# Altium PCB Copy of SoM.PcbDoc (part 5 of 8)
Units mm, origin at the board's own origin, x right, y up, seen from the top; angles counter-clockwise.
Board outline 69.6 x 50 mm, 10 copper layers ([1] Signal HS-H, [2] GND, [3] Signal HS-V, [4] Signal H, [5] GND, [6] POWER, [7] Signal V, [8] Signal HS-H, [9] GND, [10] Signal HS-V), stack 1.146 mm thick; 537 components, 516 nets, 5689 pads, 981 vias.
Unrouted connection lines stored in the file: 963.
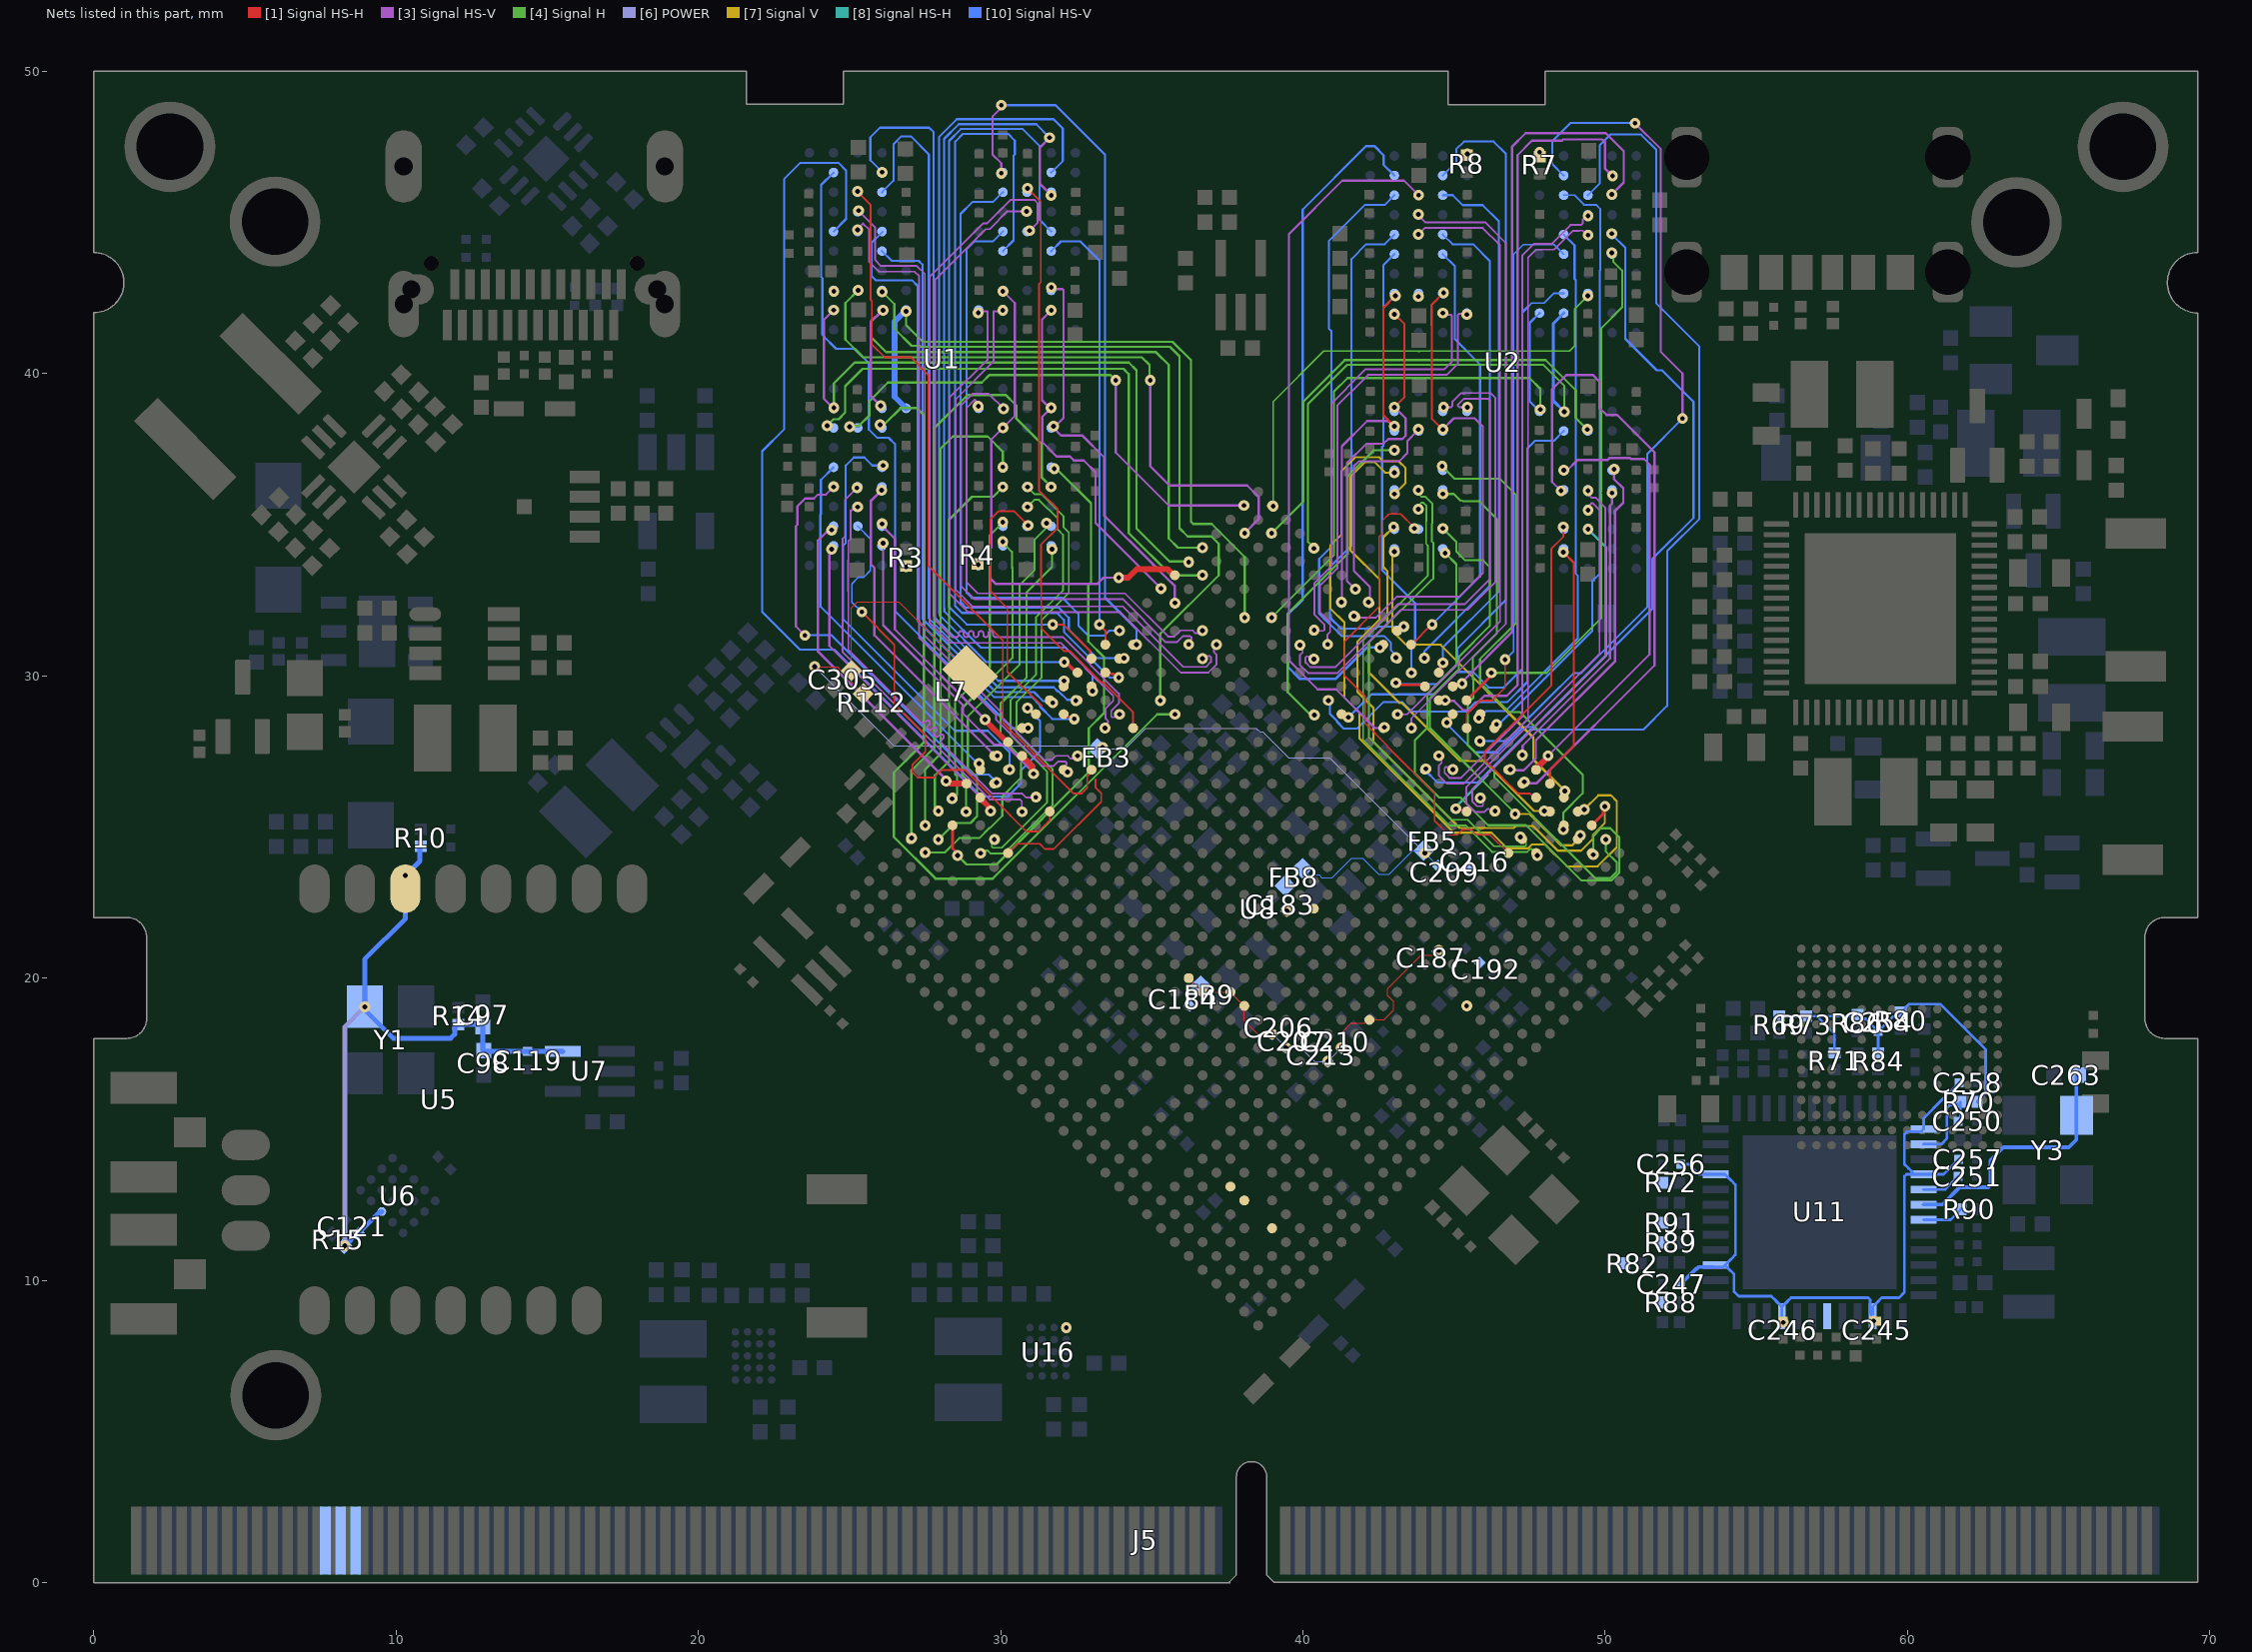
[diagram p10: the nets of this part, all layers, seen from the top]

## Via types
v1: diameter 0.36, hole 0.16, [1] Signal HS-H to [10] Signal HS-V, 895 vias
v2: diameter 0.35, hole 0.16, [1] Signal HS-H to [10] Signal HS-V, 22 vias
v3: diameter 0.4, hole 0.2, [1] Signal HS-H to [10] Signal HS-V, 13 vias
v4: diameter 0.35, hole 0.15, [1] Signal HS-H to [10] Signal HS-V, 12 vias
v5: diameter 0.35, hole 0.15, [1] Signal HS-H to [8] Signal HS-H, 11 vias
v6: diameter 0.35, hole 0.2, [1] Signal HS-H to [8] Signal HS-H, 6 vias
v7: diameter 0.5, hole 0.25, [1] Signal HS-H to [10] Signal HS-V, 6 vias
v8: diameter 0.35, hole 0.15, [3] Signal HS-V to [10] Signal HS-V, 6 vias
v9: diameter 0.35, hole 0.2, [3] Signal HS-V to [10] Signal HS-V, 4 vias
v10: diameter 0.36, hole 0.16, [1] Signal HS-H to [3] Signal HS-V, 4 vias
v11: diameter 0.5, hole 0.25, [1] Signal HS-H to [8] Signal HS-H, 2 vias

## Nets (pads, with @x,y where several pads share a name; then routed paths per layer and width w, separated by ;. In a path a pad name is that pad's centre, name@x,y a point inside that pad or via, vN(x,y) a via of type N, cw(c..) or ccw(c..) an arc to the next point about the centre after c; other vN are vias at no path point)
+1V8: C97.2 C98.2 C119.2 C121.2 R10.2 R14.2 R15.1 U5.13 U6.C4 U7.5 Y1.4 | length 24.1
  [6] POWER w0.16: v1(8.312,11.145) 8.312,18.394 v1(8.968,19.05)
  [10] Signal HS-V w0.16: R15.1@8.286,11.145 v1(8.312,11.145) 8.732,11.566 C121.2@8.758,11.566 9.444,12.252 9.509,12.252 U6.C4@9.533,12.277 ; R10.2@10.82,24.358 10.793,24.33 10.793,23.874 v1(10.312,23.393) 10.312,21.971 8.968,20.627 v1(8.968,19.05) 8.968,18.95 9.918,18 10.05,18 10.058,18.009 11.811,18.009 11.945,18.143 11.945,18.355 12.055,18.465 R14.2@12.065,18.465 12.802,18.465 C97.2@12.878,18.39 12.878,17.628 C98.2@12.903,17.602 12.933,17.572 C119.2@14.351,17.572 14.353,17.574 15.517,17.574 U7.5@15.519,17.577
A5_U1: R3.1 U1.A5
  other v1: 26.873,33.604
A5_U2: R7.2 U2.A5
  other v1: 47.828,47.321
A8_U1: R4.1 U1.A8
  other v1: 29.261,33.68
A8_U2: R8.2 U2.A8
  other v1: 45.441,47.27
ADC_IN0: J5.26 U8.AG26
ADC_IN2: J5.28 U8.AG25
ADC_IN3: J5.30 U8.AG28
AVDD3V3_RGMII: C250.2 C251.2 R70.2 U11.6 U11.38 U11.41 | length 4.4
  [10] Signal HS-V w0.09: U11.41@60.529,13.007 61.247,13.007 C251.2@61.676,13.437 ; U11.38@60.529,14.507 61.116,14.507 61.303,14.694 61.303,15.71 61.392,15.799 61.645,15.799 R70.2@61.747,15.9 61.747,15.336 C250.2@61.676,15.265
AVDD_0V9: C183.2 FB8.2 U8.R17
  other v1: 39.465,22.22
AVDD_1V8: C184.2 FB9.2 U8.P18
CKXTAL1: C263.2 U11.42 Y3.1 | length 8.6
  [10] Signal HS-V w0.12: U11.42@60.529,12.507 61.148,12.507 61.722,13.081 62.668,13.081 62.738,13.151 62.738,13.97 63.17,14.402 65.329,14.402 65.586,14.659 Y3.1@65.586,15.462 65.586,16.728 C263.2@65.648,16.79
CKXTAL2: R90.2 U11.43 | length 1.4
  [10] Signal HS-V w0.09: U11.43@60.529,12.007 61.424,12.007 61.765,12.348 R90.2@61.765,12.358
CPU_B_SLEEP: U8.M27 U16.A1
  other v1: 32.172,8.439 45.415,19.075
DDR0_A0: U1.H2 U1.R2 U8.F2 | length 19.6
  [4] Signal H w0.077: v1(24.257,38.278) 24.469,38.489 24.64,38.489 24.858,38.708 24.858,39.579 25.437,40.157 34.061,40.157 34.239,39.98 34.239,34.722 35.634,33.327 v1(36.682,33.327)
  other v1: 24.486,42.723
DDR0_A1: U1.J2 U1.P2 U8.F1 | length 22.2
  [3] Signal HS-V w0.077: v1(24.475,42.1) 24.155,41.78 24.155,39.167 24.46,38.862 v1(24.486,38.862)
  [4] Signal H w0.077: v1(24.486,38.862) 24.486,39.675 25.171,40.361 34.239,40.361 34.493,40.107 34.493,34.874 35.585,33.782 36.195,33.782 v1(36.22,33.757)
DDR0_A2: U1.H9 U1.R9 U8.G1 | length 16.5
  [1] Signal HS-H w0.192: v1(33.909,33.249) 34.224,33.249 34.504,33.528 35.524,33.528 35.725,33.327 U8.G1@35.762,33.327
  [3] Signal HS-V w0.077: v1(30.075,42.725) 30.472,42.328 30.472,38.597 v1(30.075,38.2) 29.693,37.818 29.693,34.239 29.652,34.198 29.652,33.228 29.834,33.045 33.199,33.045 33.402,33.249 v1(33.909,33.249)
DDR0_A4: U1.H11 U1.R11 U8.H2 | length 13
  [3] Signal HS-V w0.077: v2(31.674,42.85) 31.726,42.798 32.035,42.798 32.08,42.752 32.08,38.532 31.75,38.202 32.006,37.946 32.705,37.946 33.426,37.224 33.426,35.299 35.036,33.69 35.46,33.266 35.763,32.963 v1(35.763,32.41)
  other v1: 31.75,38.252
DDR0_A5: U1.J11 U1.P11 U8.H1 | length 11.6
  [3] Signal HS-V w0.077: v1@31.623,38.862 31.369,39.116 31.369,41.783 v1(31.674,42.088) ; v1(31.674,38.862) 31.648,38.837 31.377,38.566 31.377,37.736 31.861,37.252 ; 31.862,37.253 32.293,37.253 32.424,37.122 32.748,37.122 33.139,36.731 33.139,35.06 v1(35.306,32.893)
DDR0_CKE0: U1.J4 U1.P4 U8.E1 | length 21.6
  [3] Signal HS-V w0.077: v1(26.035,38.938) 25.705,39.268 25.705,41.707 v1@26.06,42.062
  [4] Signal H w0.077: v1@26.06,42.062 25.705,41.707 25.705,41.224 26.223,40.706 35.139,40.706 35.56,40.284 35.56,34.544 35.865,34.239 v1(36.678,34.239)
  other v1: 26.111,42.088
DDR0_CKE1: U1.J5 U1.P5 U8.F5 | length 23.5
  [4] Signal H w0.077: v1(26.873,42.062) 26.873,41.605 27.426,41.052 35.689,41.052 36.297,40.445 36.297,35.103 36.373,35.027 36.982,35.027 38.075,33.934 v1(38.075,31.928)
  [10] Signal HS-V w0.191: U1.J5@26.875,38.85 26.492,39.233 26.492,41.717 U1.P5@26.875,42.1
DDR0_CLK1_N: U1.P9 U8.J5 | length 20.1
  [3] Signal HS-V w0.062: v1(30.074,42.088) 30.05,42.064 29.762,42.064 29.762,40.391 28.51,39.139 28.51,32.856 29.072,32.295 34.038,32.295 36.037,30.296 36.795,30.296 36.955,30.456 36.955,30.622 36.919,30.658 36.851,30.658 36.762,30.569 v1(36.682,30.569)
DDR0_CLK1_P: U1.P8 U8.H5 | length 20.9
  [3] Signal HS-V w0.062: v1(29.261,42.012) 29.313,42.064 29.573,42.064 29.573,40.469 28.321,39.218 28.321,32.715 28.931,32.106 33.96,32.106 35.959,30.106 36.873,30.106 37.144,30.378 37.144,30.7 37.052,30.792 37.052,30.859 37.141,30.948 v1(37.141,31.029)
DDR0_CLK_N: U1.J9 U8.J4 | length 16.5
  [3] Signal HS-V w0.062: v1(30.099,38.837) 29.611,39.325 29.069,39.325 28.691,38.946 28.691,32.981 29.134,32.537 34.036,32.537 35.463,31.11 35.828,31.11 36.03,31.312 36.27,31.312 36.307,31.276 36.307,31.206 36.22,31.119 v1(36.22,31.039)
DDR0_CLK_P: U1.J8 U8.H4 | length 15.1
  [3] Signal HS-V w0.062: v1(29.261,38.913) 29.261,38.993 29.166,39.088 29.166,39.117 29.148,39.135 28.88,38.868 28.88,33.096 29.249,32.727 34.114,32.727 35.541,31.3 35.75,31.3 35.951,31.502 36.349,31.502 36.441,31.41 36.511,31.41 36.597,31.496 v1(36.678,31.496)
DDR0_CS0N: U1.H4 U8.M6 | length 28.3
  [4] Signal H w0.077: v1(26.01,38.303) 26.064,38.357 26.191,38.357 26.689,38.855 27.235,38.855 27.457,38.633 27.457,27.788 26.467,26.797 26.467,24.67 27.845,23.292 29.745,23.292 35.181,28.727 v1(35.763,28.727)
DDR0_CS1N: U1.H3 U8.B1 | length 17.2
  [3] Signal HS-V w0.077: v5(33.807,39.776) 33.807,37.389 35.56,35.636 v1(38.049,35.636)
  [4] Signal H w0.077: v1(25.012,38.24) 25.033,38.261 25.307,38.261 25.662,38.616 25.662,39.093 26.27,39.7 29.38,39.7 29.634,39.954 33.63,39.954 v5(33.807,39.776)
DDR0_CS2N: U1.R4 U8.M5 | length 24.4
  [4] Signal H w0.077: v1(26.086,42.697) 26.484,42.299 26.484,41.487 27.051,40.919 27.323,40.919 27.357,40.885 35.6,40.885 35.916,40.569 35.916,34.883 36.187,34.612 36.971,34.612 37.211,34.372 37.211,33.325 35.281,31.394 v1(35.281,29.185)
DDR0_CS3N: U1.R3 U8.C2 | length 21
  [3] Signal HS-V w0.077: v8(34.95,39.776) 34.95,36.932 35.585,36.297 38.156,36.297 38.532,35.921 38.532,35.179 v1(38.075,34.722)
  [4] Signal H w0.077: v1(25.285,42.748) 24.867,42.33 24.867,41.123 25.451,40.538 34.671,40.538 34.925,40.284 34.925,39.802 v8(34.95,39.776)
DDR0_D0: U1.B2 U8.AB2 | length 11.5
  [1] Signal HS-H w0.192: U8.AB2@29.328,25.973 29.328,25.947 29.635,25.639 29.635,25.559 v1(29.667,25.527)
  [3] Signal HS-V w0.077: v1@24.333,34.188 24.333,32.614 24.333,30.988 28.334,26.987 29.613,25.708 29.613,25.581 v1(29.667,25.527)
  other v1: 24.409,34.188
DDR0_D1: U1.C2 U8.AB1 | length 10.9
  [1] Signal HS-H w0.192: v1(28.194,26.518) 28.239,26.518 28.324,26.433 U8.AB1@28.868,26.433
  [3] Signal HS-V w0.077: v1@24.308,34.823 23.961,34.476 23.961,32.614 23.961,30.802 v1@28.245,26.518
  other v1: 24.409,34.823
DDR0_D2: U1.E2 U8.AA2 | length 14.2
  [3] Signal HS-V w0.07: v8(23.52,31.344) 23.228,31.636 23.228,34.951 23.28,35.003 23.28,35.613 23.533,35.866 23.824,35.866 23.953,35.995 24.22,35.995 v1(24.475,36.25)
  [10] Signal HS-V w0.07: v8(23.52,31.344) 24.409,31.344 29.02,26.733 29.604,26.733 v1(29.87,26.467)
DDR0_D3: U1.F2 U8.AA1 | length 12.1
  [10] Signal HS-V w0.07: U1.F2@24.475,36.9 24.055,36.48 24.055,35.344 24.04,35.33 24.04,32.297 v1@29.235,27.102
  other v1: 29.286,27.102
DDR0_D4: U1.F4 U8.Y2 | length 14.5
  [10] Signal HS-V w0.07: v1(26.111,36.957) 25.759,36.957 25.494,37.222 25.142,37.222 24.879,36.959 24.879,34.397 24.797,34.315 24.797,31.87 28.487,28.181 29.582,28.181 30.302,27.461 v1(30.302,26.899)
DDR0_D5: U1.E4 U8.Y1 | length 10.6
  [3] Signal HS-V w0.077: v1(26.06,36.144) 25.713,35.797 25.713,33.709 cw(c25.349,33.63) 25.718,33.679 25.823,33.574 25.823,32.614 25.823,31.341 v1@29.813,27.352
  other v1: 29.889,27.352
DDR0_D6: U1.C4 U8.W1 | length 9
  [1] Signal HS-H w0.192: v1(29.489,28.55) 29.489,28.532 30.21,27.811 U8.W1@30.247,27.811
  [3] Signal HS-V w0.077: v1(26.086,35.027) 26.086,34.95 26.501,34.536 26.501,31.538 v1(29.489,28.55)
DDR0_D7: U1.B4 U8.W2 | length 10.8
  [1] Signal HS-H w0.192: U8.W2@30.707,27.352 31.056,27.003 31.056,26.792 v1(31.088,26.76)
  [3] Signal HS-V w0.077: v1(26.111,34.392) 26.111,31.674 28.753,29.032 28.753,28.759 29.787,27.725 30.162,27.725 v1@31.183,26.703
DDR0_D8: U1.B11 U8.AF2 | length 13.1
  [4] Signal H w0.07: v1(27.508,24.155) 28.155,24.155 28.629,24.63 29.294,24.63 29.635,24.971 29.654,24.971 30.055,25.371 30.055,26.005 30.671,26.621 30.671,27.318 29.997,27.991 29.997,29.083 30.861,29.947 30.861,32.766 31.699,33.604 v1(31.699,34.188)
DDR0_D9: U1.C11 U8.AE2 | length 12.6
  [4] Signal H w0.07: v1(27.94,24.587) 28.485,25.133 29.007,25.133 29.223,25.349 29.223,26.643 28.917,26.949 28.917,28.663 30.632,30.378 30.632,33.006 31.128,33.502 31.128,34.507 v1@31.674,35.052
  other v1: 31.521,35.052
DDR0_D10: U1.E11 U8.AF1 | length 20.4
  [4] Signal H w0.077: v1(27.051,24.638) 27.051,26.873 27.813,27.635 27.813,38.202 28.897,39.285 30.177,39.285 30.472,38.991 30.472,38.981 30.514,38.938 30.514,38.522 31.257,37.779 31.366,37.67 31.366,36.554 v1(31.674,36.246)
DDR0_D11: U1.F11 U8.AD2 | length 17.8
  [1] Signal HS-H w0.1: U8.AD2@28.409,25.054 28.409,24.291 28.575,24.124 v1(28.575,24.054)
  [4] Signal H w0.077: v1(28.575,24.054) 28.871,23.757 29.861,23.757 32.918,26.814 32.918,28.263 33.418,28.763 33.418,30.62 32.901,31.137 32.901,32.994 32.992,33.084 32.992,33.296 32.992,35.708 31.844,36.855 v1(31.775,36.855)
DDR0_D12: U1.F9 U8.AE1 | length 15.6
  [4] Signal H w0.07: v1(27.508,25.044) 27.508,26.918 28.016,27.426 28.016,37.516 28.417,37.916 29.571,37.916 30.074,37.414 v1(30.074,36.906)
DDR0_D13: U1.E9 U8.AD1 | length 12.1
  [4] Signal H w0.07: v1(27.94,25.527) 27.825,25.642 27.825,26.707 28.296,27.178 28.296,35.166 29.055,35.925 29.753,35.925 v1(30.074,36.246)
DDR0_D14: U1.C9 U8.AC1 | length 9.9
  [4] Signal H w0.07: v1@28.423,25.933 28.563,26.074 28.563,26.67 28.499,26.735 28.499,29.134 29.642,30.277 29.642,34.646 v1(30.074,35.077)
  other v1: 28.397,25.933
DDR0_D15: U1.B9 U8.AC2 | length 9.8
  [4] Signal H w0.07: v1(28.854,25.502) 28.854,26.605 28.727,26.732 28.727,28.931 30.392,30.595 30.392,33.469 ccw(c30.024,33.498) 30.375,33.611 30.375,34.101 30.074,34.403 v1(30.074,34.442)
DDR0_D16: U1.AA2 U8.V1 | length 22.5
  [1] Signal HS-H w0.1: U8.V1@30.707,28.271 v1(30.912,28.27)
  [10] Signal HS-V w0.07: U1.AA2@24.475,46.65 24.066,46.241 24.066,43.193 24.105,43.155 24.105,41.275 24.562,40.818 25.171,40.818 25.642,40.347 25.642,38.689 25.641,38.687 25.641,38.15 25.91,37.881 cw(c25.857,37.516) 25.928,37.878 26.294,37.878 26.504,37.668 26.504,32.145 30.378,28.27 v1(30.912,28.27)
DDR0_D18: U1.V2 U8.U1 | length 33.4
  [10] Signal HS-V w0.07: U1.V2@24.475,44.7 24.892,45.117 24.892,46.711 24.631,46.972 23.375,46.972 22.835,46.431 22.835,38.151 22.115,37.431 22.115,32.114 23.368,30.861 24.511,30.861 29.363,26.009 30.243,26.009 30.671,26.437 30.671,26.865 31.306,27.5 31.306,28.511 v1(30.886,28.931)
DDR0_D20: U1.U4 U8.T1 | length 18.6
  [10] Signal HS-V w0.07: U1.U4@26.075,44.05 26.397,43.728 27.289,43.728 27.414,43.603 27.414,31.892 29.847,29.46 31.106,29.46 31.406,29.159 31.648,29.159 v2@31.674,29.134
  other v2: 31.725,29.108
DDR0_D21: U1.V4 U8.T2 | length 21.2
  [1] Signal HS-H w0.07: U8.T2@32.085,28.731 32.156,28.731 32.256,28.63 v1@32.38,28.63
  [10] Signal HS-V w0.07: U1.V4@26.091,44.684 25.73,44.323 25.73,43.231 25.883,43.078 27.077,43.078 27.254,42.901 27.254,31.826 29.781,29.3 31.039,29.3 31.305,29.034 31.305,28.981 31.711,28.575 v1(32.436,28.575)
DDR0_D22: U1.Y4 U8.R2 | length 24.6
  [10] Signal HS-V w0.07: U1.Y4@26.075,46 26.455,46.38 26.455,47.579 26.722,47.847 27.028,47.847 27.628,47.247 27.628,31.905 29.913,29.62 31.758,29.62 31.898,29.48 31.925,29.48 32.202,29.204 32.467,29.204 v1(32.487,29.185)
DDR0_D23: U1.AA4 U8.R1 | length 24.8
  [10] Signal HS-V w0.07: v1(26.086,46.66) 25.691,47.054 25.691,47.815 26.01,48.133 27.635,48.133 27.788,47.98 27.788,31.972 29.727,30.032 29.926,29.833 v1(32.094,29.833)
DDR0_D24: U1.AA11 U8.P1 | length 27.2
  [1] Signal HS-H w0.12: v1(32.106,30.455) 32.153,30.455 32.498,30.11 U8.P1@32.545,30.11
  [10] Signal HS-V w0.07: U1.AA11@31.675,46.65 32.055,47.03 32.055,48.108 31.75,48.412 28.55,48.412 27.969,47.831 27.969,32.074 27.991,32.052 27.991,31.995 29.531,30.455 v1(32.106,30.455)
DDR0_D25: U1.Y11 U8.P2 | length 28.2
  [1] Signal HS-H w0.07: U8.P2@33.005,29.65 33.045,29.609 v1(33.045,29.489)
  [3] Signal HS-V w0.077: v1(31.623,47.803) 31.301,47.481 31.301,46.27 v1(31.674,45.898)
  [10] Signal HS-V w0.07: 28.143,32.131 29.337,30.937 32.145,30.937 33.045,30.037 v1(33.045,29.489)
  [10] Signal HS-V w0.077: 28.143,32.131 28.143,32.205 28.132,32.216 28.132,47.764 28.617,48.249 31.177,48.249 v1(31.623,47.803)
DDR0_D26: U1.V11 U8.N1 | length 27.3
  [1] Signal HS-H w0.07: v1(31.725,31.699) 32.078,31.699 32.955,30.822 32.955,30.619 U8.N1@33.005,30.569
  [10] Signal HS-V w0.07: U1.V11@31.675,44.7 31.293,45.082 31.293,47.523 30.731,48.085 28.685,48.085 28.296,47.696 28.296,32.283 28.88,31.699 v1(31.725,31.699)
DDR0_D27: U1.U11 U8.M1 | length 14.8
  [1] Signal HS-H w0.07: v1(33.274,31.699) 33.274,31.677 33.464,31.486 U8.M1@33.464,31.029
  [10] Signal HS-V w0.07: U1.U11@31.675,44.05 31.997,44.372 32.629,44.372 33.274,43.727 33.274,33.579 v1(33.274,31.699)
DDR0_D28: U1.U9 U8.N2 | length 28.5
  [1] Signal HS-H w0.09: U8.N2@33.464,30.11 33.51,30.064 33.719,30.064 33.836,29.947 v1(33.909,29.947)
  [10] Signal HS-V w0.07: U1.U9@30.075,44.05 30.429,44.404 30.429,47.211 30.468,47.25 30.468,47.709 30.251,47.925 28.751,47.925 28.499,47.673 28.499,32.306 28.725,32.08 31.865,32.08 32.094,31.852 32.094,31.457 33.604,29.947 v1(33.909,29.947)
DDR0_D29: U1.V9 U8.L1 | length 18.7
  [10] Signal HS-V w0.07: U1.V9@30.075,44.7 29.753,44.378 29.148,44.378 28.88,44.11 28.88,32.741 29.042,32.578 32.046,32.578 32.574,32.051 32.574,31.658 32.902,31.33 33.427,31.33 33.593,31.496 v1(33.934,31.496)
DDR0_D30: U1.Y9 U8.M2 | length 21.1
  [1] Signal HS-H w0.1: U8.M2@33.924,30.569 33.936,30.582 v2(34.087,30.582)
  [10] Signal HS-V w0.07: U1.Y9@30.075,46 29.747,45.672 29.068,45.672 28.677,45.281 28.677,32.436 28.854,32.258 31.914,32.258 32.254,31.918 32.254,31.526 33.198,30.582 v2(34.087,30.582)
DDR0_D31: U1.AA9 U8.L2 | length 23.3
  [3] Signal HS-V w0.07: v1(30.023,46.626) 30.023,46.957 29.73,47.25 29.73,48.501 29.943,48.714 29.943,48.722 30.023,48.802 v8(30.023,48.878)
  [10] Signal HS-V w0.07: v8(30.023,48.878) 31.818,48.878 33.452,47.244 33.452,32.588 34.496,31.544 v1(34.496,31.029)
  [10] Signal HS-V w0.1: U1.AA9@30.074,46.634 30.074,46.651 U1.AA9@30.075,46.65
DDR0_DM0: U1.C3 U8.Y5 | length 15.9
  [1] Signal HS-H w0.06: v4(25.405,32.111) 26.486,31.03 26.486,29.061 27.51,28.036 27.51,27.815 27.51,27.49 27.081,27.06 27.081,26.813 27.259,26.634 27.796,26.634 28.043,26.882 28.827,26.882 30.332,25.377 30.332,25.363 30.847,24.849 31.251,24.849 31.626,25.223 U8.Y5@31.626,25.513
  [10] Signal HS-V w0.06: U1.C3@25.275,34.95 25.694,34.531 25.694,33.485 25.473,33.264 25.302,33.264 25.081,33.044 25.081,32.435 v4(25.405,32.111)
DDR0_DM1: U1.C10 U8.AC5 | length 13.2
  [1] Signal HS-H w0.06: U8.AC5@30.247,24.135 30.556,24.443 31.291,24.443 31.462,24.272 31.759,24.272 33.327,25.84 33.327,26.113 33.142,26.297 33.142,26.574 ; v1(30.911,34.975) 30.446,35.441 29.923,35.441 29.66,35.179 29.66,32.802 30.224,32.239 30.224,30.137 31.361,29
DDR0_DM2: U1.Y3 U8.U5 | length 24.5
  [1] Signal HS-H w0.06: v1@25.273,45.999 25.705,45.568 25.705,42.429 25.743,42.391 25.743,40.957 26.162,40.538 27.026,40.538 27.61,39.954 27.61,33.63 30.074,31.166 30.074,28.449 31.029,27.494 31.029,27.485 32.403,26.111 32.678,26.111 32.867,26.299 32.867,26.682 33.005,26.819 U8.U5@33.005,26.892
  other v1: 25.273,46.025
DDR0_DM3: U1.Y10 U8.P5 | length 20
  [1] Signal HS-H w0.06: v1(30.886,46.126) 31.327,45.686 31.327,43.017 31.267,42.958 31.267,36.137 31.885,35.519 31.885,34.889 31.335,34.339 31.335,32.96 31.344,32.951 31.344,31.565 32.09,30.819 32.291,30.819 33.322,29.788 33.389,29.788 34.384,28.793 U8.P5@34.384,28.271
DDR0_DQS0_N: U1.E3 U8.AA4 | length 14
  [3] Signal HS-V w0.062: v1(25.248,36.217) 24.851,35.82 24.851,34.609 24.775,34.533 24.775,33.905 24.769,33.9 24.769,32.711 24.776,32.705 24.776,30.777 27.09,28.464 28.45,27.103 29.641,25.912 30.634,25.912 30.702,25.844 30.702,25.508 v1(30.709,25.502)
DDR0_DQS0_P: U1.D3 U8.Y4 | length 14.1
  [3] Signal HS-V w0.062: v1(25.273,35.585) 25.192,35.585 25.09,35.483 25.04,35.483 25.04,34.531 24.964,34.455 24.964,33.827 24.959,33.822 24.959,32.803 24.965,32.796 24.965,30.856 27.223,28.597 27.245,28.575 27.364,28.456 ccw(c27.422,28.514) 27.479,28.456 27.522,28.499 cw(c27.579,28.441) 27.636,28.499 cw(c27.579,28.441) 27.636,28.384 27.594,28.342 ccw(c27.651,28.284) 27.594,28.227 ccw(c27.651,28.284) 27.709,28.227 27.751,28.269 cw(c27.809,28.212) 27.866,28.269 cw(c27.809,28.212) 27.866,28.154 27.824,28.112 ccw(c27.881,28.055) 27.824,27.997 ccw(c27.881,28.055) 27.938,27.997 27.981,28.04 cw(c28.038,27.982) 28.095,28.04 cw(c28.038,27.982) 28.095,27.925 28.053,27.883 ccw(c28.11,27.825) 28.053,27.768 28.168,27.653 28.19,27.631 29.719,26.102 30.712,26.102 30.836,25.978 31.159,25.978 v1(31.166,25.984)
DDR0_DQS1_N: U1.E10 U8.AD4 | length 15.6
  [4] Signal H w0.062: v1(29.337,24.13) 29.418,24.13 29.504,24.216 29.574,24.216 29.666,24.125 30.116,24.125 31.72,25.729 31.72,26.912 30.521,28.111 30.521,29.118 31.359,29.957 31.359,31.85 32.254,32.745 32.254,34.743 32.076,34.921 32.076,35.282 31.347,36.01 31.122,36.01 v1(30.886,36.246)
DDR0_DQS1_P: U1.D10 U8.AC4 | length 14.8
  [4] Signal H w0.062: v1(29.794,24.587) 29.794,24.507 29.708,24.42 29.708,24.35 29.744,24.314 30.037,24.314 31.531,25.808 31.531,26.834 30.332,28.033 30.332,29.197 31.17,30.035 31.17,31.929 32.064,32.823 32.064,34.665 31.887,34.843 31.887,35.203 31.269,35.821 31.122,35.821 v1(30.886,35.585)
DDR0_DQS2_N: U1.V3 U8.V4 | length 22.5
  [3] Signal HS-V w0.062: v1(25.273,44.755) 25.273,44.788 25.45,44.965 25.654,44.76 25.654,43.686 25.968,43.372 27.153,43.372 27.305,43.219 27.305,32.614 27.305,31.25 29.641,28.915 29.855,28.701 29.855,28.543 31.377,27.021 31.758,27.021 31.903,27.166 32.138,27.166 32.174,27.129 32.174,27.062 32.085,26.973 v1@32.085,26.892
  other v1: 32.212,26.816
DDR0_DQS2_P: U1.W3 U8.U4 | length 22.6
  [3] Signal HS-V w0.062: v1(25.298,45.39) 25.298,45.384 25.843,44.839 25.843,43.764 26.046,43.561 27.231,43.561 27.494,43.298 27.494,32.614 27.494,31.329 30.044,28.779 30.044,28.622 31.455,27.21 31.68,27.21 31.825,27.355 32.216,27.355 32.308,27.263 32.376,27.263 32.465,27.352 v1(32.545,27.352)
DDR0_DQS3_N: U1.V10 U8.R4 | length 25.5
  [3] Signal HS-V w0.062: v1(30.963,44.729) 31.226,44.993 31.226,45.628 31.109,45.745 30.336,45.745 29.559,44.968 29.427,44.968 27.649,43.191 27.649,32.614 27.649,31.761 28.321,31.09 30.029,31.09 31.987,31.09 32.789,30.288 32.789,30.266 33.724,29.33 33.724,29.172 33.472,28.919 33.472,28.586 33.551,28.507 33.551,28.45 33.452,28.351 v1(33.452,28.27)
DDR0_DQS3_P: U1.W10 U8.P4 | length 24.6
  [3] Signal HS-V w0.062: v1(30.861,45.364) 30.223,45.364 29.637,44.779 29.505,44.779 27.838,43.112 27.838,31.84 28.399,31.279 28.538,31.279 ccw(c28.538,31.36) 28.619,31.36 28.619,31.401 cw(c28.7,31.401) 28.7,31.482 cw(c28.7,31.401) 28.781,31.401 28.781,31.36 ccw(c28.862,31.36) 28.862,31.279 ccw(c28.862,31.36) 28.943,31.36 28.943,31.401 cw(c29.025,31.401) 29.025,31.482 cw(c29.025,31.401) 29.106,31.401 29.106,31.36 ccw(c29.187,31.36) 29.187,31.279 ccw(c29.187,31.36) 29.268,31.36 29.268,31.401 cw(c29.349,31.401) 29.349,31.482 cw(c29.349,31.401) 29.43,31.401 29.43,31.36 ccw(c29.511,31.36) 29.511,31.279 ccw(c29.511,31.36) 29.593,31.36 29.593,31.401 cw(c29.674,31.401) 29.674,31.482 cw(c29.674,31.401) 29.755,31.401 29.755,31.36 ccw(c29.836,31.36) 29.836,31.279 30.029,31.279 32.065,31.279 32.978,30.366 32.978,30.344 33.914,29.409 33.914,29.093 33.661,28.841 33.661,28.665 33.697,28.628 33.755,28.628 33.854,28.727 v1(33.934,28.727)
DDR1_A2: U2.H9 U2.R9 U8.B9 | length 16.1
  [1] Signal HS-H w0.07: v1(44.625,38.151) 44.26,38.516 44.26,41.593 44.256,41.596 44.256,42.275 v1(44.653,42.672)
  [3] Signal HS-V w0.07: v1@41.758,31.928 42.415,31.928 43.101,32.614 45.161,32.614 45.949,33.401 45.949,38.252 45.683,38.518 44.993,38.518 v1(44.625,38.151)
  other v1: 41.681,31.979
DDR1_A3: U2.H10 U2.R10 U8.A9 | length 7.7
  [3] Signal HS-V w0.07: v1@42.215,32.334 42.215,32.944 41.681,33.477 41.681,36.932 41.846,37.096 43.18,37.096 43.453,37.369 43.453,37.771 43.815,38.133 v1(43.815,38.151)
  other v1: 42.164,32.436 43.815,42.545
DDR1_A4: U2.H11 U2.R11 U8.B8 | length 12
  [1] Signal HS-H w0.07: v1(43.028,38.252) 42.659,38.621 42.659,42.176 v1(43.053,42.57)
  [3] Signal HS-V w0.07: v1@41.275,32.385 41.291,32.401 41.291,37.596 42.123,38.428 42.801,38.428 42.977,38.252 v1(43.028,38.252)
  other v1: 41.275,32.436
DDR1_A5: U2.J11 U2.P11 U8.A8 | length 11.1
  [1] Signal HS-H w0.07: v1(43.028,38.887) 43.358,39.218 43.358,41.631 v1(43.028,41.961)
  [3] Signal HS-V w0.07: v1(41.732,32.868) 41.451,33.149 41.451,37.031 42.102,37.682 42.104,37.68 42.67,37.68 42.824,37.834 43.29,37.834 43.397,37.941 43.397,38.518 v1(43.028,38.887)
DDR1_CKE0: U2.J4 U2.P4 U8.A5 | length 18.5
  [4] Signal H w0.07: v1(40.361,34.214) 40.361,34.234 40.169,34.426 40.169,39.001 41.453,40.284 47.955,40.284 48.641,39.599 v1(48.641,38.735)
  [10] Signal HS-V w0.1: U2.P4@48.625,38.75 48.288,39.087 48.288,41.663 U2.J4@48.625,42
DDR1_CKE1: U2.J5 U2.P5 U8.E6 | length 19.7
  [4] Signal H w0.07: v1(38.964,31.928) 41.021,33.985 41.021,39.395 41.478,39.853 47.498,39.853 47.854,39.497 v1(47.854,38.811)
  [10] Signal HS-V w0.07: U2.P5@47.825,38.75 47.503,39.072 47.503,41.678 U2.J5@47.825,42
DDR1_CLK1_N: U2.P9 U8.E8 | length 16.7
  [3] Signal HS-V w0.063: v1(39.903,31.013) 39.903,30.933 39.989,30.847 39.989,30.776 39.897,30.684 39.897,30.364 40.169,30.093 41.142,30.093 43.231,32.182 45.441,32.182 46.368,33.11 46.368,39.193 46.205,39.356 45.361,39.356 45.356,39.351 45.236,39.351 44.939,39.054 44.939,38.924 44.903,38.887 v1@44.628,38.887
  other v1: 44.653,38.887
DDR1_CLK1_P: U2.P8 U8.E9 | length 15.3
  [3] Signal HS-V w0.063: v1(40.361,30.556) 40.28,30.556 40.194,30.642 40.123,30.642 40.087,30.605 40.087,30.443 40.247,30.282 41.063,30.282 43.152,32.371 45.362,32.371 46.179,33.188 46.179,39.114 46.126,39.167 45.638,39.167 45.633,39.161 45.314,39.161 45.129,38.976 45.129,38.924 45.166,38.887 v1(45.441,38.887)
DDR1_CLK_N: U2.J9 U8.D8 | length 14.6
  [3] Signal HS-V w0.063: v1(40.372,31.511) 40.395,31.488 40.674,31.488 40.711,31.524 40.711,31.687 40.381,32.017 40.381,33.066 40.945,33.63 40.945,39.014 41.963,40.033 42.074,40.144 44.679,40.144 44.93,40.395 44.93,41.906 44.894,41.943 44.682,41.943 v1(44.625,42)
DDR1_CLK_P: U2.J8 U8.D9 | length 14.8
  [3] Signal HS-V w0.063: v1(40.818,31.039) 40.808,31.048 40.808,31.354 40.9,31.446 40.9,31.766 40.571,32.095 40.571,32.988 41.134,33.551 41.134,38.936 42.019,39.82 42.153,39.954 44.757,39.954 45.12,40.317 45.12,41.246 45.12,41.27 45.12,41.938 45.156,41.975 45.4,41.975 v1(45.425,41.949)
DDR1_CS0N: U2.H4 U8.F12 | length 20.3
  [10] Signal HS-V w0.06: 47.473,42.24 47.565,42.333 47.979,42.333 48.296,42.65 U2.H4@48.625,42.65
  [10] Signal HS-V w0.07: v1(41.504,28.626) 42.266,29.388 43.008,29.388 ccw(c43.07,29.752) 43.132,29.388 44.335,29.388 45.078,30.131 45.624,30.131 46.139,29.616 46.644,29.616 47.257,30.229 47.257,42.024 47.473,42.24
DDR1_CS1N: U2.H3 U8.A2 | length 16
  [4] Signal H w0.06: v1(39.014,35.611) 39.014,39.065 40.691,40.742 43.763,40.742 ccw(c43.84,41.097) 43.918,40.742 48.819,40.742 48.997,40.919 48.997,42.145 v1(49.425,42.574)
DDR1_CS2N: U2.R4 U8.F11 | length 17.3
  [10] Signal HS-V w0.07: v2(40.843,29.185) 40.894,29.134 40.894,28.743 41.122,28.515 41.122,28.485 41.351,28.257 41.795,28.257 42.672,29.134 43.282,29.134 43.594,28.821 45.395,28.821 45.707,29.134 46.764,29.134 47.422,29.792 47.422,37.517 47.683,37.778 48.303,37.778 U2.R4@48.625,38.1
DDR1_CS3N: U2.R3 U8.B3 | length 16.2
  [4] Signal H w0.077: v1(38.964,34.722) 40.006,35.764 40.006,37.363 40.006,39.069 41.385,40.448 48.023,40.448 49.014,39.457 49.014,38.54 v1(49.403,38.151)
DDR1_D0: U2.B2 U8.B15 | length 24.8
  [3] Signal HS-V w0.077: v2(44.709,29.19) 44.731,29.168 45,29.168 45.314,28.854 45.517,28.854 45.999,29.337 46.742,29.337 47.098,29.693 47.098,47.225 47.574,47.701 48.57,47.701 48.612,47.744 49.894,47.744 49.987,47.65 49.987,46.787 v1(50.241,46.533)
DDR1_D1: U2.C2 U8.A15 | length 24.2
  [3] Signal HS-V w0.077: v1(45.263,29.743) 45.263,29.794 46.914,31.445 46.914,47.498 47.364,47.949 50.019,47.949 50.614,47.354 50.614,46.321 v1(50.216,45.923)
DDR1_D2: U2.E2 U8.B16 | length 23.7
  [1] Signal HS-H w0.09: v1(44.755,28.448) 44.755,28.489 44.955,28.689 U8.B16@44.955,28.731
  [10] Signal HS-V w0.07: v1(44.755,28.448) 44.755,28.409 45.694,27.469 46.443,27.469 47.273,28.299 47.64,28.299 48.355,29.014 51.554,32.213 51.554,33.861 52.917,35.224 52.917,39.064 51.875,40.106 51.702,40.106 50.66,41.148 50.66,44.165 U2.E2@50.225,44.6
  other v1: 50.216,44.628
DDR1_D3: U2.F2 U8.A16 | length 18.1
  [1] Signal HS-H w0.09: U8.A16@45.414,29.19 46.228,30.004 v1(46.228,30.099)
  [4] Signal H w0.07: v1(46.228,30.099) 48.057,30.099 49.86,31.902 49.86,35.993 cw(c50.225,36.048) 49.86,36.104 49.86,41.492 50.559,42.191 50.559,43.409 50.261,43.708 50.261,43.948 v1(50.216,43.993)
DDR1_D4: U2.F4 U8.B17 | length 18.5
  [1] Signal HS-H w0.06: U8.B17@45.414,28.271 45.414,28.726 45.873,29.185 46.261,29.185 46.685,29.61 v1(46.685,30.531)
  [10] Signal HS-V w0.06: v1(46.685,30.531) 46.965,30.81 46.965,43.942 47.29,44.267 48.308,44.267 U2.F4@48.625,43.95
DDR1_D5: U2.E4 U8.A17 | length 17.9
  [10] Signal HS-V w0.07: v1(45.822,28.6) 46.05,28.829 46.685,28.829 49.086,31.23 49.086,31.38 49.088,31.381 49.088,33.318 49.022,33.383 49.022,43.09 48.985,43.127 48.985,44.24 U2.E4@48.625,44.6
DDR1_D6: U2.C4 U8.A18 | length 19.9
  [10] Signal HS-V w0.06: U2.C4@48.625,45.9 48.977,45.9 49.294,45.583 49.692,45.583 49.835,45.441
  [10] Signal HS-V w0.07: v1(46.406,28.397) 46.48,28.397 47.725,29.643 49.576,31.494 49.576,33.148 49.821,33.393 49.821,43.409 49.835,43.422 49.835,45.441
DDR1_D7: U2.B4 U8.B18 | length 28.8
  [3] Signal HS-V w0.07: v8(50.978,48.285) 51.841,47.422 51.841,40.716 52.553,40.005 v4(52.553,38.506)
  [10] Signal HS-V w0.07: v1(45.847,27.838) 46.699,27.838 48.115,29.254 48.947,30.087 49.201,30.087 51.394,32.28 51.394,37.348 v4(52.553,38.506) ; U2.B4@48.625,46.55 48.247,46.928 48.247,47.688 48.844,48.285 v8(50.978,48.285)
DDR1_D8: U2.B11 U8.B11 | length 23.5
  [10] Signal HS-V w0.077: v1(42.545,30.937) 42.113,30.937 41.072,29.896 39.903,29.896 39.497,30.302 39.497,32.012 39.988,32.504 39.988,45.423 42.09,47.526 42.36,47.526 42.669,47.216 42.669,46.906 U2.B11@43.025,46.55
DDR1_D9: U2.C11 U8.B12 | length 18.7
  [10] Signal HS-V w0.07: U2.C11@43.025,45.9 42.7,45.575 42.045,45.575 40.855,44.386 40.855,41.485 40.945,41.396 40.945,34.276 40.538,33.87 40.538,32.055 41.277,31.317 42.687,31.317 42.914,31.09 42.914,30.846 43.078,30.681 v1(43.078,30.607)
DDR1_D10: U2.E11 U8.A11 | length 16.5
  [10] Signal HS-V w0.07: U2.E11@43.025,44.6 42.701,44.276 42.096,44.276 41.605,43.786 41.605,34.315 40.893,33.603 40.893,31.927 41.261,31.559 42.397,31.559 42.461,31.623 v1(43.332,31.623)
DDR1_D11: U2.F11 U8.B13 | length 14.5
  [10] Signal HS-V w0.07: 42.621,37.567 42.66,37.605 42.66,38.202 42.659,38.203 42.659,43.584 U2.F11@43.025,43.95
  [10] Signal HS-V w0.077: 42.621,37.567 42.621,33.493 43.711,32.403 43.711,31.039 43.586,30.914 v1(43.586,30.099)
DDR1_D12: U2.F9 U8.A12 | length 14.4
  [1] Signal HS-H w0.07: U8.A12@43.576,31.029 43.589,31.029 44.259,31.699 v1(44.272,31.699)
  [10] Signal HS-V w0.07: v1(44.272,31.699) 45.212,32.639 45.86,33.287 45.86,40.296 45.022,41.135 45.022,43.553 U2.F9@44.625,43.95
DDR1_D13: U2.E9 U8.A13 | length 16
  [10] Signal HS-V w0.07: v1(44.018,30.582) 44.018,30.81 46.177,32.969 46.177,43.725 45.625,44.278 44.947,44.278 U2.E9@44.625,44.6
DDR1_D14: U2.C9 U8.A14 | length 18
  [1] Signal HS-H w0.07: U8.A14@44.495,30.11 44.495,30.18 44.572,30.257 44.572,30.374 v1(44.628,30.429)
  [10] Signal HS-V w0.07: U2.C9@44.625,45.9 44.956,45.9 45.284,45.572 45.944,45.572 46.482,45.034 46.482,32.791 44.628,30.937 v1(44.628,30.429)
DDR1_D15: U2.B9 U8.B14 | length 23.9
  [1] Signal HS-H w0.07: v1(43.078,29.769) 43.122,29.725 43.122,29.7 43.986,29.7 U8.B14@44.036,29.65
  [10] Signal HS-V w0.07: v1(43.078,29.769) 43.117,29.73 44.45,29.73 45.11,30.39 45.11,30.912 46.711,32.512 46.711,47.269 46.304,47.676 45.325,47.676 45.072,47.423 45.072,46.997 U2.B9@44.625,46.55
DDR1_D18: U2.V2 U8.A20 | length 9.9
  [3] Signal HS-V w0.077: v1@47.253,27.352 47.263,27.362 47.263,27.682 50.159,30.578 50.159,35.635 50.225,35.701 v1(50.225,36.048)
  other v1: 47.253,27.377
DDR1_D19: U2.U2 U8.B20 | length 12
  [3] Signal HS-V w0.077: v1@46.787,26.873 47.301,26.873 47.701,27.273 47.701,27.864 50.326,30.489 50.326,35.458 50.598,35.73 50.598,36.203 50.292,36.508 v1(50.292,36.83)
  other v1: 46.863,26.899
DDR1_D20: U2.U4 U8.A21 | length 14.7
  [1] Signal HS-H w0.191: U8.A21@47.713,26.892 47.713,26.926 48.108,27.322 v1(48.108,27.356)
  [3] Signal HS-V w0.077: v1(48.108,27.356) 51.46,30.709 51.46,36.994 51.281,37.173 50.846,37.173 50.808,37.211 50.146,37.211 50.07,37.135 49.073,37.135 v1@48.717,36.779
  other v1: 48.625,36.8
DDR1_D21: U2.V4 U8.B21 | length 21.7
  [3] Signal HS-V w0.077: v1@47.244,26.441 47.72,26.441 51.628,30.349 51.628,37.393 50.387,38.633 50.04,38.633 49.811,38.862 49.811,39.726 49.583,39.954 49.15,39.954 49.143,39.948 48.711,39.948 48.243,39.48 48.243,36.415 v2(48.539,36.119)
  other v1: 47.32,26.492
DDR1_D22: U2.Y4 U8.B22 | length 11
  [1] Signal HS-H w0.06: U8.B22@47.713,25.973 47.639,25.973 47.502,26.111 47.111,26.111 46.593,26.629 46.593,26.637 46.012,27.218 46.012,27.485 46.471,27.945 46.72,28.194 46.736,28.194 48.212,29.67 48.212,34.198 48.616,34.602 v1(48.616,34.925)
DDR1_D23: U2.AA4 U8.A22 | length 8.1
  [1] Signal HS-H w0.07: U8.A22@48.172,26.433 48.172,26.898 48.959,27.686 48.959,33.743 v1(48.616,34.087)
DDR1_D24: U2.AA11 U8.A23 | length 11
  [7] Signal V w0.07: v1(43.028,34.112) 43.028,34.034 42.963,33.97 42.963,31.47 43.407,31.026 44.553,31.026 47.622,27.957 47.622,27.232 v1(48.666,26.187)
DDR1_D25: U2.Y11 U8.B23 | length 13
  [7] Signal V w0.07: v1(43,34.926) 42.659,34.585 42.659,33.592 42.799,33.452 42.799,31.725 42.176,31.102 42.176,30.124 43.204,29.096 43.282,29.096 45.2,27.178 45.999,27.178 47.65,25.527 v1(47.981,25.527)
DDR1_D26: U2.V11 U8.A24 | length 26.4
  [7] Signal V w0.07: v2(43.028,36.017) 43.394,36.384 43.394,36.877 43.175,37.096 42.653,37.096 42.517,37.232 41.728,37.232 41.275,36.779 41.275,34.677 40.906,34.308 40.906,32.232 41.377,31.762 41.377,29.275 41.873,28.779 41.873,27.927 44.991,24.808 46.236,24.808 46.749,24.294 47.453,24.294 47.582,24.423 47.995,24.423 48.345,24.073 48.384,24.034 48.4,24.034 48.735,23.698 49.747,23.698 50.382,24.333 50.382,25.854 50.187,26.048 49.772,26.048 v1(49.301,25.578)
DDR1_D27: U2.U11 U8.A25 | length 22.5
  [1] Signal HS-H w0.1: U8.A25@49.551,25.054 49.939,25.442 49.939,25.632 v2(49.987,25.679)
  [7] Signal V w0.07: v1(43.025,36.724) 42.716,36.724 42.368,37.072 42.062,37.072 41.58,36.59 41.58,34.138 42.533,33.184 42.533,31.865 41.795,31.127 41.795,29.477 42.328,28.944 42.328,27.813 45.173,24.968 46.976,24.968 47.04,25.032 47.612,25.032 48.432,24.212 49.194,24.212 49.591,24.609 49.591,24.738 49.987,25.134 v2(49.987,25.679)
DDR1_D28: U2.U9 U8.B24 | length 16.3
  [4] Signal H w0.07: v1(44.602,36.932) 45.009,36.525 46.507,36.525 47.051,35.982 47.051,31.725 47.027,31.725 45.859,30.556 45.859,29.776 46.838,28.797 47.188,28.797 48.756,27.23 49.251,26.735 49.251,26.112 48.616,25.477 v1(48.616,24.917)
DDR1_D29: U2.V9 U8.A26 | length 18.2
  [4] Signal H w0.06: 45.205,35.802 45.268,35.802 45.298,35.772 45.835,35.772
  [4] Signal H w0.07: v1(44.628,36.017) 44.99,36.017 45.205,35.802 ; 45.835,35.772 46.414,35.193 46.414,31.403 45.618,30.607 45.618,29.91 45.632,29.896 45.632,29.262 45.453,29.082 45.453,27.711 46.334,26.83 46.334,26.64 47.641,25.333 47.641,25.319 47.694,25.266 48.329,24.631 48.382,24.578 48.396,24.578 49.67,23.304 50.165,23.304 50.382,23.52 50.382,23.83 50.013,24.199 v1(50.013,24.587)
DDR1_D30: U2.Y9 U8.B25 | length 15
  [4] Signal H w0.07: v2(44.628,34.874) 45.073,34.429 45.073,34.11 45.363,33.821 45.961,33.821 46.177,33.604 46.177,31.648 45.157,30.628 45.157,30.209 44.196,29.248 44.196,28.27 v1@47.015,25.451
  [7] Signal V w0.07: v1(47.015,25.425) 47.498,25.425 48.527,24.397 48.911,24.397 49.102,24.587 v1@49.124,24.587
  other v1: 49.174,24.714
DDR1_D31: U2.AA9 U8.B26 | length 19.2
  [4] Signal H w0.07: v2(44.704,34.061) 45.073,33.692 45.073,32.295 45.073,30.353 44.116,29.396 44.116,28.278 43.7,27.862 43.7,26.771 44.499,25.972 45.212,25.972 46.128,25.056 47.377,25.056 49.21,23.224 50.199,23.224 50.462,23.487 50.462,24.66 50.165,24.956 49.86,24.956 49.606,24.703 v1(49.606,24.079)
DDR1_DM0: U2.C3 U8.E17 | length 32.7
  [10] Signal HS-V w0.07: v1@44.018,26.899 44.45,26.467 45.758,26.467 47.511,28.219 51.257,28.219 52.045,29.007 52.045,34.125 53.111,35.192 53.111,40.894 51.689,42.316 51.689,47.396 51.181,47.904 50.165,47.904 49.823,47.562 49.823,46.298 U2.C3@49.425,45.9
  other v1: 44.069,26.924
DDR1_DM1: U2.C10 U8.E14 | length 23.4
  [3] Signal HS-V w0.07: v1@42.672,28.27 42.381,28.27 41.098,29.554 40.487,29.554 39.534,30.506 39.534,44.614 41.3,46.38 43.345,46.38 v1(43.825,45.9)
  other v1: 42.697,28.296
DDR1_DM2: U2.Y3 U8.E20 | length 12
  [1] Signal HS-H w0.07: v1(45.06,25.603) 45.105,25.558 45.37,25.558 U8.E20@45.414,25.513
  [8] Signal HS-H w0.07: v1(45.06,25.603) 45.06,25.668 46.108,26.716 46.108,26.754 50.037,30.683 50.037,34.24 v1(49.428,34.849)
DDR1_DM3: U2.Y10 U8.E23 | length 16
  [1] Signal HS-H w0.05: v1@43.688,34.9 43.231,35.357 42.85,35.357 42.641,35.148 42.641,34.716 42.523,34.598 42.523,32.285 41.377,31.139 41.377,30 42.054,29.322 42.054,28.425 42.788,27.691 42.788,27.669 44.353,26.104 44.353,25.208 44.823,24.737 45.109,24.737 45.283,24.911 45.568,24.911 45.743,24.737 46.191,24.737 U8.E23@46.793,24.135
  other v1: 43.688,34.874
DDR1_DQS0_N: U2.E3 U8.D17 | length 22.3
  [3] Signal HS-V w0.063: v1(44.501,27.356) 44.501,27.275 44.587,27.189 44.587,27.119 44.494,27.026 44.494,26.707 44.766,26.435 45.306,26.435 47.447,28.576 47.447,43.84 47.705,44.098 48.302,44.098 48.926,44.723 49.15,44.723 49.154,44.727 49.249,44.727 49.348,44.628 v1@49.428,44.628
  other v1: 49.428,44.577
DDR1_DQS0_P: U2.D3 U8.D18 | length 22
  [3] Signal HS-V w0.063: v1(44.958,26.899) 44.878,26.899 44.792,26.984 44.721,26.984 44.684,26.948 44.684,26.785 44.845,26.625 45.227,26.625 47.258,28.655 47.258,43.919 47.627,44.288 48.223,44.288 48.848,44.912 49.072,44.912 49.076,44.916 49.2,44.916 49.261,44.977 49.261,45.096 v1@49.428,45.263
  other v1: 49.428,45.212
DDR1_DQS1_N: U2.E10 U8.D14 | length 20.1
  [3] Signal HS-V w0.063: v1(43.129,28.727) 43.452,28.727 46.521,31.796 46.521,44.242 45.948,44.815 44.028,44.815 v1(43.815,44.602)
DDR1_DQS1_P: U2.D10 U8.D15 | length 20.6
  [3] Signal HS-V w0.063: v1(43.586,28.27) 43.586,28.593 46.711,31.718 46.711,44.32 46.026,45.005 44.04,45.005 43.815,45.23 v1(43.815,45.263)
DDR1_DQS2_N: U2.V3 U8.D20 | length 13.1
  [3] Signal HS-V w0.063: v1(45.872,25.959) 45.872,25.878 45.958,25.792 45.958,25.722 45.922,25.685 45.759,25.685 45.598,25.845 45.598,26.244 49.999,30.644 49.999,35.569 49.672,35.896 49.541,35.896 49.485,35.952 49.485,36.062 v1(49.428,36.119)
DDR1_DQS2_P: U2.W3 U8.D21 | length 13.3
  [3] Signal HS-V w0.063: v1(46.355,25.527) 46.298,25.584 46.148,25.584 46.144,25.587 46.092,25.587 46,25.495 45.68,25.495 45.409,25.767 45.409,26.322 49.809,30.723 49.809,35.49 49.593,35.706 49.541,35.706 49.485,35.651 49.485,35.541 v1(49.428,35.484)
DDR1_DQS3_N: U2.V10 U8.D23 | length 16.3
  [4] Signal H w0.062: v1(43.815,36.144) 43.872,36.087 43.872,35.977 43.927,35.921 44.057,35.921 44.278,35.701 44.278,35.04 44.263,35.025 44.263,34.449 44.319,34.393 44.319,33.227 44.23,33.138 42.18,31.088 42.18,27.967 44.908,25.238 45.453,25.238 46.328,24.363 47.343,24.363 47.38,24.4 47.38,24.463 47.256,24.587 v1@47.244,24.587
  other v1: 47.193,24.663
DDR1_DQS3_P: U2.W10 U8.D24 | length 16.6
  [4] Signal H w0.062: v1(43.815,35.509) 43.872,35.566 43.872,35.677 43.927,35.732 43.979,35.732 44.088,35.622 44.088,35.119 44.073,35.104 44.073,34.371 44.129,34.315 44.129,33.306 44.096,33.272 41.991,31.167 41.991,27.888 44.83,25.049 45.375,25.049 46.249,24.174 47.422,24.174 47.514,24.266 47.565,24.266 47.752,24.079 v1(47.752,24.054)
DDR1_RST: U2.T11 U8.G11 | length 11.1
  [4] Signal H w0.077: v1(40.381,28.704) 40.327,28.758 40.198,28.758 39.542,29.413 39.497,29.458 39.497,32.055 41.478,34.036 41.478,36.601 42.342,37.465 v1(43.028,37.465)
DVDD: C245.2 C246.2 C247.2 C256.2 C257.2 C258.2 U11.3 U11.9 U11.15 U11.21 U11.37 U11.40 | length 25
  [10] Signal HS-V w0.09: C256.2@52.497,13.843 52.756,13.843 53.092,13.507 U11.21@53.659,13.507 53.959,13.507 54.157,13.309 54.16,13.309 54.305,13.164 54.305,10.85 54.16,10.705 54.157,10.705 U11.15@53.959,10.507 ; U11.15@53.59,10.438 53.89,10.438 U11.15@53.959,10.507 ; U11.9@55.844,8.822 U11.9@55.844,9.122 ; C257.2@61.69,14.009 61.188,13.507 U11.40@60.529,13.507 U11.40@60.229,13.507 ; C258.2@61.701,16.535 61.163,15.997 60.529,15.363 U11.37@60.529,15.007 60.444,14.922 59.984,14.922 59.893,14.832 59.893,13.84 60.028,13.705 60.031,13.705 U11.40@60.229,13.507 ; U11.15@53.959,10.507 54.157,10.309 54.16,10.309 54.261,10.208 54.261,9.629 54.414,9.476 55.494,9.476 55.646,9.323 55.646,9.32 U11.9@55.844,9.122 ; U11.9@55.844,9.122 56.042,9.32 56.042,9.323 56.143,9.424 58.697,9.424 58.759,9.362 58.759,8.907 U11.3@58.844,8.822 58.844,9.122 59.042,9.32 59.042,9.323 59.143,9.424 59.713,9.424 59.893,9.604 59.893,13.437 59.964,13.507 U11.40@60.229,13.507
  [10] Signal HS-V w0.122: C247.2@52.497,9.881 53.005,10.389 53.035,10.389 53.085,10.438 U11.15@53.59,10.438
  other v1: 55.88,8.611 58.877,8.657
DVDD3V3_RGMII: C254.2 R69.2 R70.1 R71.2 R72.2 R73.2 R80.2 R82.2 R84.2 R86.2 R88.2 R89.2 R91.2 | length 12.1
  [10] Signal HS-V w0.09: R69.2@55.758,18.735 56.631,18.735 R73.2@56.642,18.746 56.997,18.746 ; R71.2@57.582,17.527 57.582,18.161 56.997,18.746 ; R84.2@59.03,17.527 C254.2@59.03,18.242 ; R70.1@62.307,15.9 62.307,15.91 62.579,16.183 62.579,17.637 61.076,19.14 60.053,19.14 59.78,18.867 R80.2@59.77,18.867 59.625,18.722 59.51,18.722 C254.2@59.03,18.242 ; 56.997,18.746 58.293,18.746 R86.2@58.344,18.797 58.489,18.652 58.62,18.652 C254.2@59.03,18.242
EDP_AVDD_0V9: C187.2 C192.2 C206.2 C207.2 C209.2 C210.2 C213.2 C216.2 C305.2 FB3.2 FB5.2 FB8.1 L7.2 R112.2 U8.AA16 U8.AA17 U8.H20 U8.L24 U8.T24 U8.V24 U8.W24 U8.Y18 U8.Y19 U8.Y21 U8.Y22 | length 51.5
  [1] Signal HS-H w0.021: v1(23.851,30.302) 24.593,30.302 24.724,30.171 C305.2@25.063,30.171 ; R112.2@25.452,29.404 25.063,29.793 C305.2@25.063,30.171 ; L7.2@28.99,30.102 26.642,32.45 25.262,32.45 25.063,32.252 C305.2@25.063,30.171 ; U8.AA16@36.222,19.998 U8.AA17@36.682,19.538 U8.Y18@37.601,19.538 U8.Y19@38.061,19.079 38.061,18.592 38.493,18.159 v1(38.98,18.159) ; v1(41.278,17.7) 41.278,18.187 41.595,18.504 42.035,18.504 42.151,18.619 U8.T24@42.197,18.619 42.684,18.619 43.001,18.936 43.001,19.221 42.799,19.423 42.799,19.654 43.906,20.76 44.338,20.76 v1(44.495,20.917)
  [6] POWER w0.002: v1(23.851,30.302) 26.466,27.687 27.67,27.687 33.036,27.687 33.131,27.592 34.129,27.592 34.807,28.27 38.456,28.27 38.579,28.146 38.668,28.146 39.535,27.28 40.89,27.28 v1(44.036,24.135) ; v1(38.98,18.159) v1(39.439,17.7) 39.924,17.7 40.384,17.24 v1(40.818,17.24) v1(41.278,17.7)
  [10] Signal HS-V w0.021: FB8.1@39.988,23.63 39.988,23.615 40.189,23.414 40.529,23.414 40.62,23.323 40.972,23.323 41.618,23.968 41.97,23.968 42.503,23.436 42.85,23.436 43.635,24.221 FB5.2@43.997,24.221 43.997,24.177 C209.2@44.466,23.707 44.935,23.707 45.002,23.64 C216.2@45.471,23.64
  other v1: 33.376,27.635